# Altium PCB Line_follower1_PCB.PcbDoc (part 2 of 2)
Units mil, origin at the board's own origin, x right, y up, seen from the top; angles counter-clockwise.
Board outline 3907.67 x 2313.18 mil, 2 copper layers (Top Layer, Bottom Layer); 67 components, 62 nets, 270 pads, 120 vias.
Unrouted connection lines stored in the file: 2.
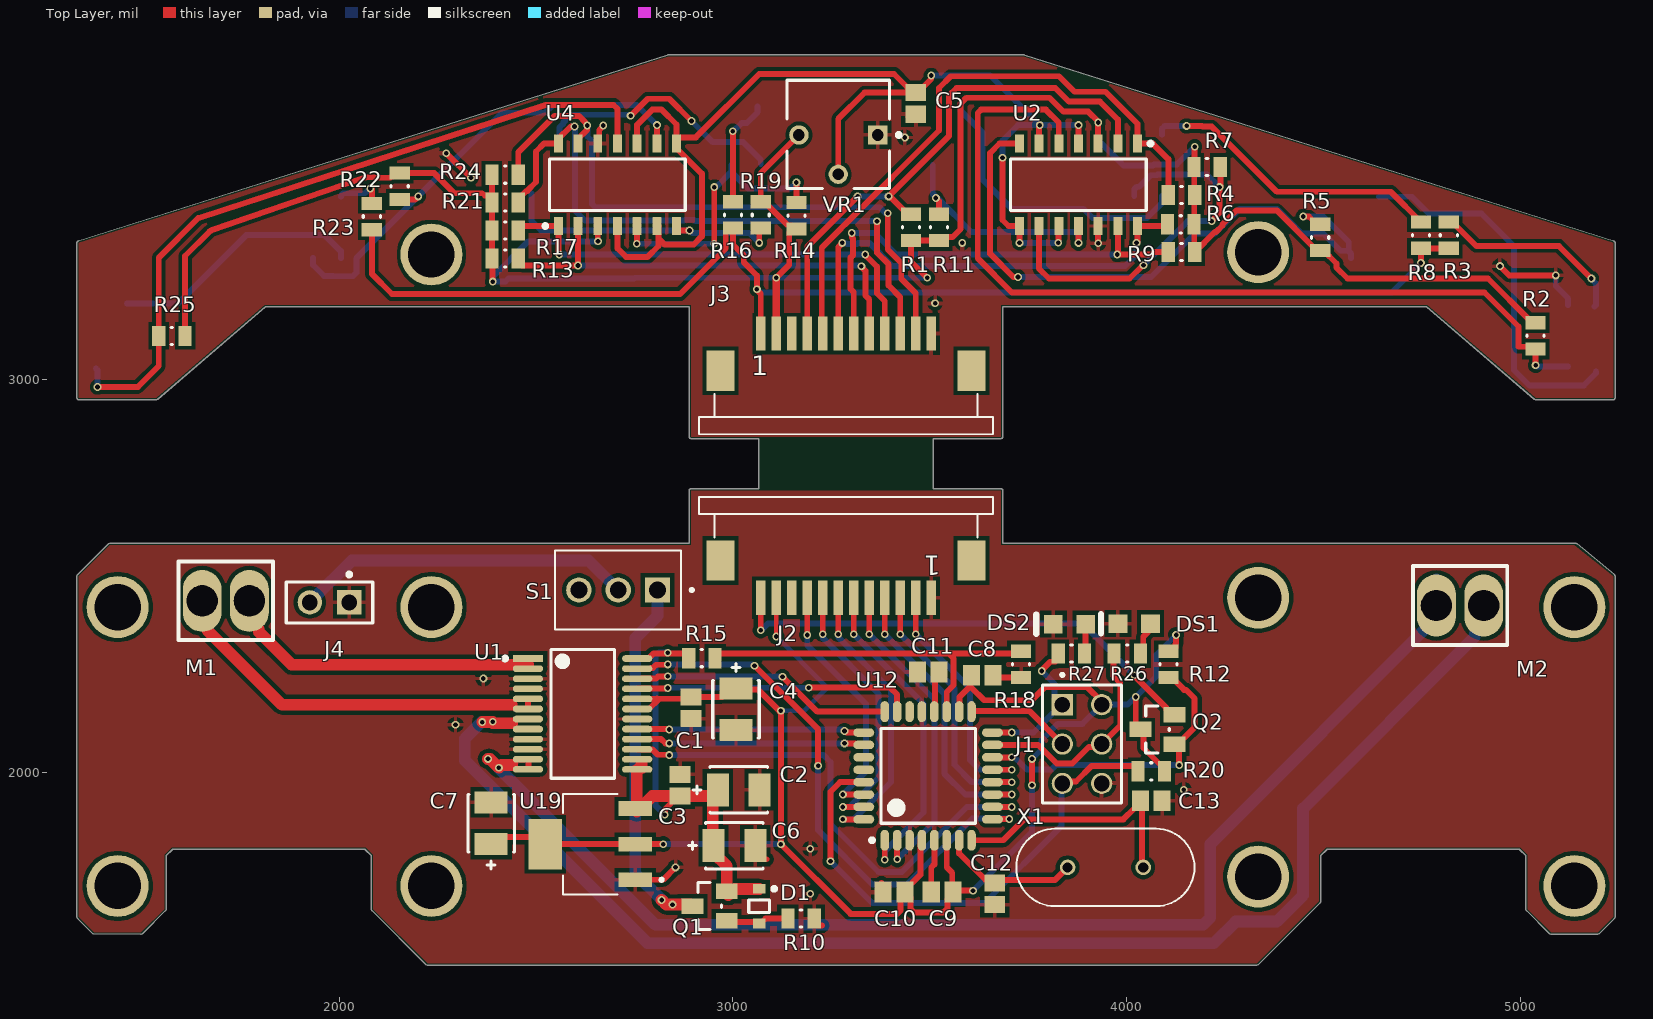
[diagram p0: Top Layer view]

## Polygon pours and split planes (outlines as drawn) (continued)
GND on Top Layer "NONET_L-01_P-001" (solid, pour order 1): 2893.7,2854.33 2893.7,3188.98 1811.02,3188.98 1535.43,2952.76 1338.58,2952.76 1338.58,3346.46 2400.79,3681.89 2834.65,3818.9 3740.16,3818.9 5236.22,3346.46 5236.22,2952.76 5039.37,2952.76 4763.78,3188.98 3681.1,3188.98 3681.1,2854.33

## Other copper
Multi-Layer:

## Silkscreen, mask and mechanical layers (free items; w line width, h text height)
Mechanical 1:
  lines w10: 1948.82,2578.74 1417.32,2578.74 ; 1948.82,3188.98 1811.02,3188.98 ; 2578.74,2578.74 2893.7,2578.74 ; 2578.74,3188.98 2893.7,3188.98 ; 2992.13,2854.33 2893.7,2854.33 ; 3010.83,2716.54 2992.13,2716.54 2893.7,2716.54 ; 3010.83,2854.33 2893.7,2854.33 ; 3976.38,2578.74 3681.1,2578.74 ; 3996.06,3188.98 3681.1,3188.98 ; 4094.49,2578.74 4448.82,2578.74 ; 4094.49,3188.98 4448.82,3188.98 ; 4566.93,2578.74 5137.8,2578.74 ; 4566.93,3188.98 4763.78,3188.98 ; 1417.32,2578.74 2893.7,2578.74 ; 1417.32,2578.74 1338.58,2500 1338.58,2480.32 1338.58,1633.86 1377.95,1594.49 1496.06,1594.49 1555.12,1653.54 1555.12,1791.34 1574.8,1811.02 2066.93,1811.02 ; 1811.02,3188.98 2893.7,3188.98 ; 1811.02,3188.98 1535.43,2952.76 1338.58,2952.76 1338.58,3346.46 2834.65,3818.9 3740.16,3818.9 5236.22,3346.46 5236.22,2952.76 5039.37,2952.76 4763.78,3188.98 ; 2066.93,1811.02 2086.61,1791.34 2086.61,1653.54 2224.41,1515.75 2755.91,1515.75 4330.71,1515.75 4488.19,1673.23 4488.19,1791.34 4507.87,1811.02 5000,1811.02 5019.69,1791.34 5019.69,1692.91 5019.69,1653.54 5078.74,1594.49 5196.85,1594.49 5236.22,1633.86 5236.22,1653.54 5236.22,2500 5141.73,2578.74 3681.1,2578.74 ; 2066.93,1811.02 2066.93,1811.02 ; 2893.7,2578.74 2893.7,2716.54 ; 2893.7,2716.54 3011.81,2716.54 3070.87,2716.54 3070.87,2854.33 3011.81,2854.33 2893.7,2854.33 ; 2893.7,2854.33 2893.7,3188.98 ; 3562.99,2716.54 3503.94,2716.54 3503.94,2854.33 3562.99,2854.33 ; 3562.99,2716.54 3681.1,2716.54 ; 3562.99,2716.54 3582.68,2716.54 3681.1,2716.54 ; 3562.99,2854.33 3681.1,2854.33 ; 3562.99,2854.33 3681.1,2854.33 ; 3681.1,2578.74 3681.1,2716.54 ; 3681.1,2854.33 3681.1,3188.98 ; 3681.1,3188.98 4763.78,3188.98

## Text inside footprints (layer, text, board x,y; h text height)
J2: Top Overlay "1" at 3527.93,2551.2 h50.08 r180; Mechanical 13 "1" at 3527.98,2551.2 h50.09 r180
J3: Top Overlay "1" at 3046.87,3009.82 h50.08; Mechanical 13 "1" at 3046.82,3009.82 h50.09